# Altium PCB ArduinoMega-Template.PcbDoc
Units mm, origin at the board's own origin, x right, y up, seen from the top; angles counter-clockwise.
Board outline 101.85 x 53.59 mm, 2 copper layers (Top Layer, Bottom Layer), stack 1.671 mm thick; 7 components, 76 nets, 91 pads, 0 vias.
Unrouted connection lines stored in the file: 6.
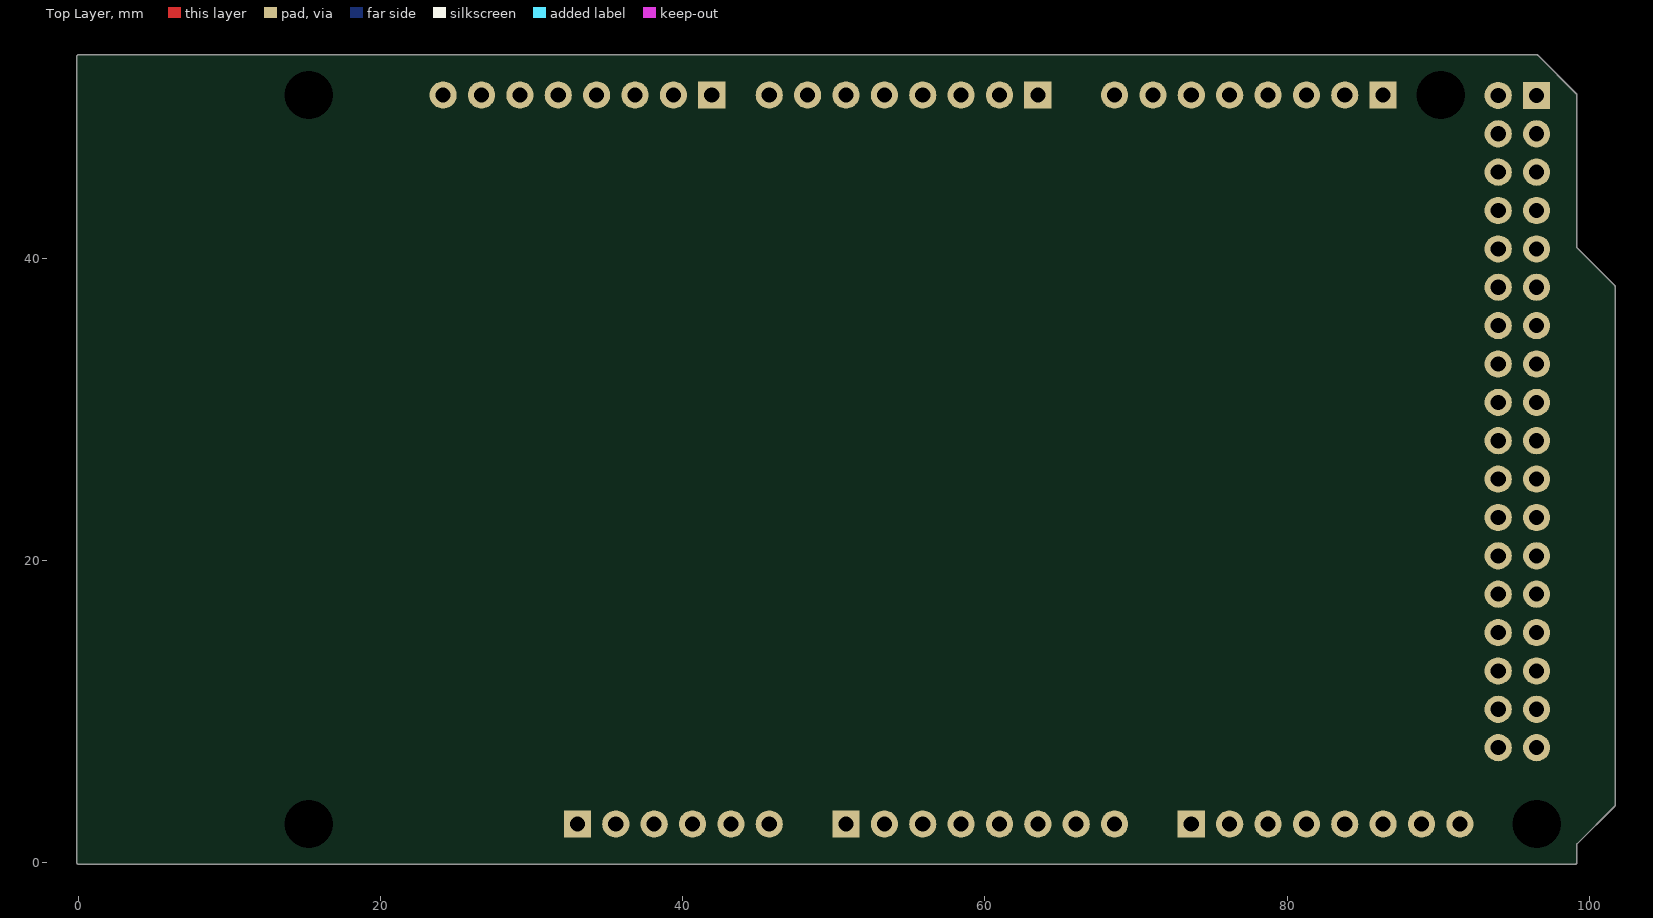
[diagram p0: Top Layer view]
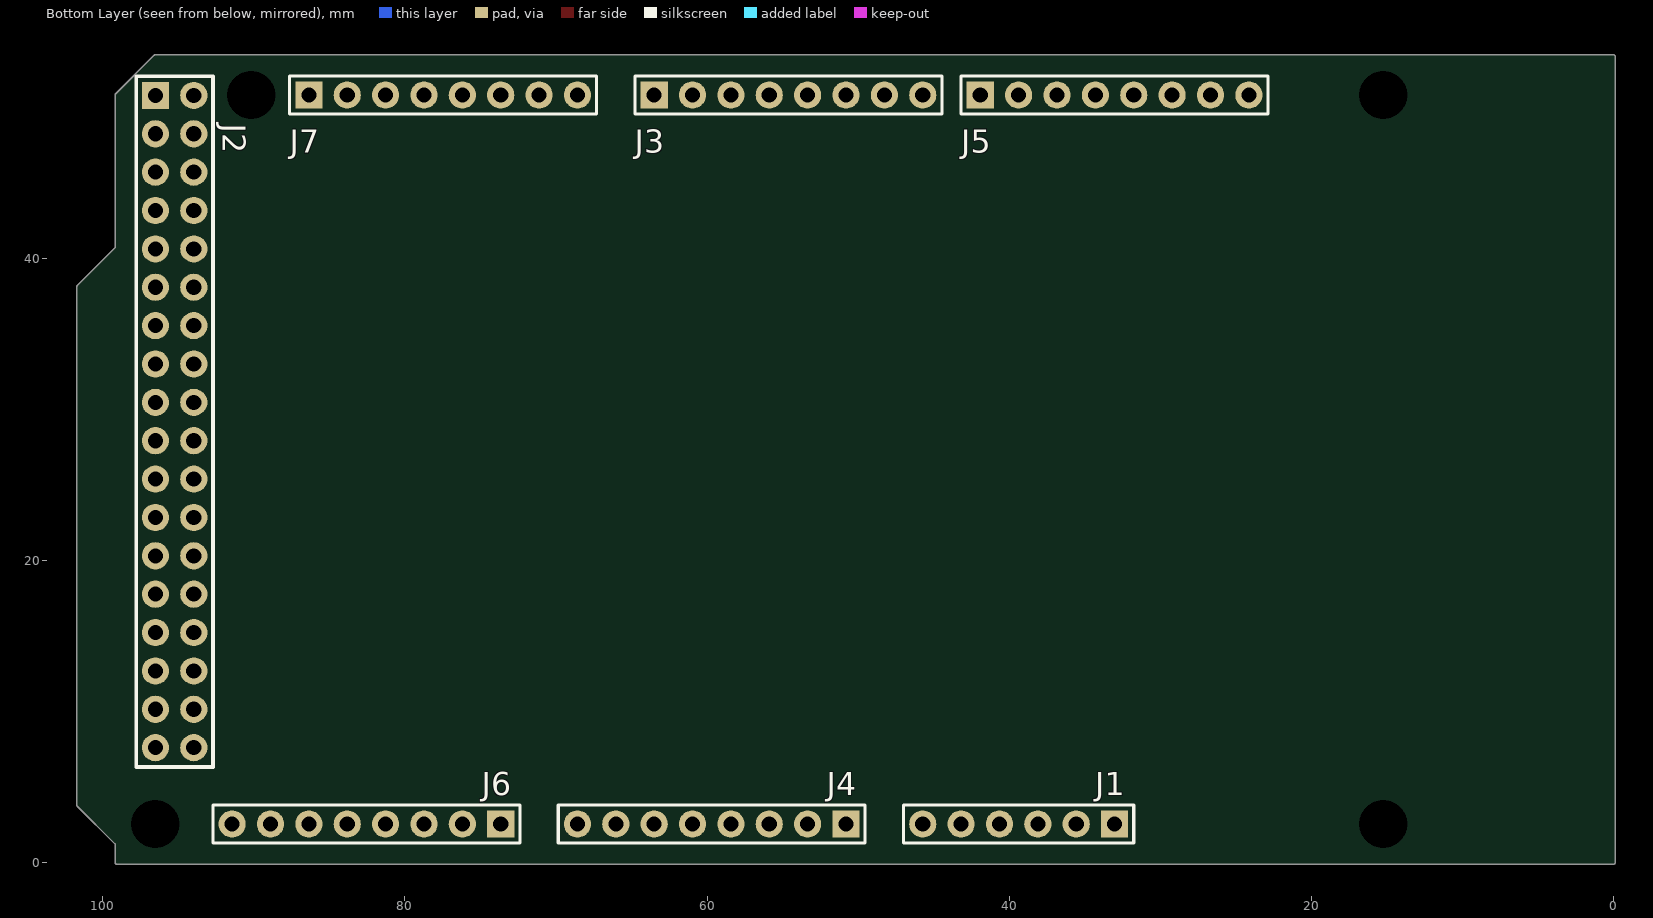
[diagram p1: Bottom Layer view, seen from below]

## Layer stack, top to bottom
Top Layer: signal copper 0.0356
Dielectric: core 1.6, FR-4, Dk 4.8
Bottom Layer: signal copper 0.0356

## Board outline
0,-0.127 99.06,-0.127 ccw(c99.06,0) 99.187,0 99.187,1.218 101.69,3.72 ccw(c101.6,3.81) 101.727,3.81 101.727,38.1 ccw(c101.6,38.1) 101.69,38.191 101.69,38.19 99.187,40.693 99.187,50.8 cw(c99.124,50.8) 99.187,50.8 ccw(c99.06,50.8) 99.187,50.8 ccw(c99.06,50.8) 99.15,50.891 99.15,50.89 96.611,53.43 ccw(c96.565,53.385) 96.61,53.43 ccw(c96.52,53.34) 96.519,53.468 96.52,53.468 cw(c96.52,53.34) 96.611,53.43 96.61,53.43 96.52,53.468 0,53.468 ccw(c0,53.34) -0.127,53.34 -0.127,0 ccw(c0,0)

## Design rules (kind name [scope] priority, off if disabled: settings)
Clearance [All] p1: gap=0.254
PolygonConnect [All] p1: connectstyle=Relief reliefconductorwidth=0.254 reliefentries=4 polygonreliefangle="90 Angle"
RoutingVias [All] p1: holewidth=0.711 width=1.27 viastyle="Through Hole" minholewidth=0.711 minwidth=1.27 maxholewidth=0.711 maxwidth=1.27
SilkscreenOverComponentPads [All] p1: minsilkscreentomaskgap=0.254
SolderMaskExpansion [All] p1: expansion=0.102
Width [All] p1: maxlimit=0.254 minlimit=0.254 preferedwidth=0.254
27 further rules are at their usual default settings.

## Components (designator, comment, footprint, x,y, rotation, side; value= is the part's Value field where it differs from the comment)
J1 "CNHDR036M3-1/6" J_HDR1X6 33.02,2.54 r0 bottom locked
J2 "CNHDR036M3-2_TBD" J_HDR2X18 96.52,50.775 r180 bottom locked
J3 "CNHDR036M3-1/8" J_HDR1X8 63.5,50.8 r180 bottom locked
J4 "CNHDR036M3-1/8" J_HDR1X8 50.8,2.54 r0 bottom locked
J5 "CNHDR036M3-1/8" J_HDR1X8 41.91,50.8 r180 bottom locked
J6 "CNHDR036M3-1/8" J_HDR1X8 73.66,2.54 r0 bottom locked
J7 "CNHDR036M3-1/8" J_HDR1X8 86.36,50.8 r180 bottom locked

## Footprints (in the part's own frame and the unit in brackets; to place one, negate y for a bottom-side part, rotate by r counter-clockwise, add the part's x,y. Pads: shape width x height; smd on the part's side, far side on the other; paste and mask are expansions set on the pad)
J_HDR1X6 [mm] "Connector; Header; 6 Position"
  rect 1.8x1.8 hole 1: 1(0,0)
  round 1.8 hole 1: 2(2.54,0) 3(5.08,0) 4(7.62,0) 5(10.16,0) 6(12.7,0)
  silkscreen extent -1.27,-1.27 13.97,1.27, body extent -1.27,-1.27 13.97,1.27, height 9.26
J_HDR1X8 [mm] "Connector; Header; 8 Position"
  rect 1.8x1.8 hole 1: 1(0,0)
  round 1.8 hole 1: 2(2.54,0) 3(5.08,0) 4(7.62,0) 5(10.16,0) 6(12.7,0) 6(12.7,0) 7(15.24,0) 8(17.78,0)
  silkscreen extent -1.27,-1.27 19.05,1.27, body extent -1.27,-1.27 19.05,1.27, height 9.26
J_HDR2X18 [mm] "Header, 2X18, unshrouded, Molex 90131-0938"
  rect 1.8x1.8 hole 1: 1(0,0)
  round 1.8 hole 1: 2(2.54,0) 3(0,-2.54) 4(2.54,-2.54) 5(0,-5.08) 6(2.54,-5.08) 7(0,-7.62) 8(2.54,-7.62) 9(0,-10.16) 10(2.54,-10.16) 11(0,-12.7) 12(2.54,-12.7) 13(0,-15.24) 14(2.54,-15.24) 15(0,-17.78) 16(2.54,-17.78) 17(0,-20.32) 18(2.54,-20.32) 19(0,-22.86) 20(2.54,-22.86) 21(0,-25.4) 22(2.54,-25.4) 23(0,-27.94) 24(2.54,-27.94) 25(0,-30.48) 26(2.54,-30.48) 27(0,-33.02) 28(2.54,-33.02) 29(0,-35.56) 30(2.54,-35.56) 31(0,-38.1) 32(2.54,-38.1) 33(0,-40.64) 34(2.54,-40.64) 35(0,-43.18) 36(2.54,-43.18)
  silkscreen extent -1.27,-44.45 3.81,1.27, body extent -1.27,-44.45 3.81,1.27, height 9.25

## Part data
J1 J3 J4 J5 J6 J7: "*"

## Free pads (board coordinates)
  round 1.524 hole 3.2 unplated mask+1.6: 0(15.24,2.54) 0(15.24,50.8) 0(90.17,50.8) 0(96.52,2.54)

## Nets (pads, with @x,y where several pads share a name; then routed paths per layer and width w, separated by ;. In a path a pad name is that pad's centre, name@x,y a point inside that pad or via, vN(x,y) a via of type N, cw(c..) or ccw(c..) an arc to the next point about the centre after c; other vN are vias at no path point)
3V3: J1.2
5V: J1.3 J2.1 J2.2
AIN0: J4.1
AIN1: J4.2
AIN2: J4.3
AIN3: J4.4
AIN4: J4.5
AIN5: J4.6
AIN6: J4.7
AIN7: J4.8
AIN8: J6.1
AIN9: J6.2
AIN10: J6.3
AIN11: J6.4
AIN12: J6.5
AIN13: J6.6
AIN14: J6.7
AIN15: J6.8
AREF: J5.8
D22: J2.4
D23: J2.3
D24: J2.6
D25: J2.5
D26: J2.8
D27: J2.7
D28: J2.10
D29: J2.9
D30: J2.12
D31: J2.11
D32: J2.14
D33: J2.13
D34: J2.16
D35: J2.15
D36: J2.18
D37: J2.17
D38: J2.20
D39: J2.19
D40: J2.22
D41: J2.21
D42: J2.24
D43: J2.23
D44: J2.26
D45: J2.25
D46: J2.28
D47: J2.27
D48: J2.30
D49: J2.29
D50: J2.32
D51: J2.31
D52: J2.34
D53: J2.33
GND: J1.4 J1.5 J2.35 J2.36 J5.7
PWM2: J3.3
PWM3: J3.4
PWM4: J3.5
PWM5: J3.6
PWM6: J3.7
PWM7: J3.8
PWM8: J5.1
PWM9: J5.2
PWM10: J5.3
PWM11: J5.4
PWM12: J5.5
PWM13: J5.6
RESET: J1.1
RX: J3.1
RX1: J7.3
RX2: J7.5
RX3: J7.7
SCL: J7.1
SDA: J7.2
TX: J3.2
TX1: J7.4
TX2: J7.6
TX3: J7.8
VIN: J1.6

## Silkscreen, mask and mechanical layers (free items; w line width, h text height)
Mechanical 1:
  drawing of 648 lines, arcs and shapes, not listed
PcbOutline:
  lines w0.254: 0,0 99.06,0 99.06,1.27 101.6,3.81 101.6,38.1 99.06,40.64 99.06,50.8 96.52,53.34 0,53.34 0,0
Mechanical 16:
  drawing of 4360 lines, arcs and shapes, not listed
  text "A" at 125.095,84.176 h1.78 r90
  text "D" at -18.415,82.906 h1.78 r270
  text "C" at 29.21,82.906 h1.78 r270
  text "B" at 74.93,82.906 h1.78 r270
  text "2" at -40.005,49.251 h1.78 r90
  text "2" at 147.955,49.251 h1.78 r90
  text "1" at -40.005,-23.139 h1.78 r90
  text "1" at 147.955,-23.139 h1.78 r90
  text "ENGINEER:" at 31.496,-26.772 h1.14
  text "TITLE:" at 69.596,-26.772 h1.14
  text ".ProjectName" at 76.835,-33.376 h2.5
  text "PCB DESIGNER:" at 31.496,-34.265 h1.14
  text ".DrawnByX" at 45.72,-37.313 h2.5
  text "DATE:" at 31.496,-42.012 h1.14
  text "PART NO.:" at 69.596,-42.012 h1.14
  text "REV:" at 122.936,-42.012 h1.14
  text ".PRINT_DATE" at 32.766,-45.06 h1.78
  text ".RevisionNR" at 123.901,-46.457 h2.5
  text "FILE NAME:" at 31.496,-49.632 h1.14
  text "DWG NO:" at 69.596,-49.632 h1.14
  text "SCALE:" at 122.936,-49.632 h1.14
  text ".PCB_FILE_NAME_NO_PATH" at 32.766,-52.68 h1.78
  text ".PCB_Nr" at 77.47,-52.984 h2.5
  text "D" at -21.412,-57.912 h1.78 r270
  text "C" at 26.594,-57.912 h1.78 r270
  text "B" at 75.108,-57.912 h1.78 r270
  text "A" at 125.095,-58.064 h1.78 r90
Mechanical 17:
  drawing of 4360 lines, arcs and shapes, not listed
  text "A" at -18.923,84.176 h1.78 r270
  text "B" at 31.242,82.906 h1.78 r90
  text "C" at 76.962,82.906 h1.78 r90
  text "D" at 124.587,82.906 h1.78 r90
  text "2" at -41.783,49.251 h1.78 r270
  text "2" at 146.177,49.251 h1.78 r270
  text "1" at -41.783,-23.139 h1.78 r270
  text "1" at 146.177,-23.139 h1.78 r270
  text "TITLE:" at 36.576,-26.772 h1.14
  text "ENGINEER:" at 74.676,-26.772 h1.14
  text ".ProjectName" at 29.337,-33.376 h2.5
  text "PCB DESIGNER:" at 74.676,-34.265 h1.14
  text ".DrawnByX" at 60.96,-37.109 h2.5
  text "REV:" at -16.764,-42.012 h1.14
  text "PART NO.:" at 36.576,-42.012 h1.14
  text "DATE:" at 74.676,-42.012 h1.14
  text ".PRINT_DATE" at 73.406,-45.06 h1.78
  text ".RevisionNR" at -17.729,-46.457 h2.5
  text "SCALE:" at -16.764,-49.632 h1.14
  text "DWG NO:" at 36.576,-49.632 h1.14
  text "FILE NAME:" at 74.676,-49.632 h1.14
  text ".PCB_FILE_NAME_NO_PATH" at 73.406,-52.68 h1.78
  text ".PCB_Nr" at 28.702,-52.984 h2.5
  text "B" at 31.064,-57.912 h1.78 r90
  text "C" at 79.578,-57.912 h1.78 r90
  text "D" at 127.584,-57.912 h1.78 r90
  text "A" at -18.923,-58.064 h1.78 r270